# EAGLE board RepRap Color Mixing companion module (EAGLE 9.0.0)
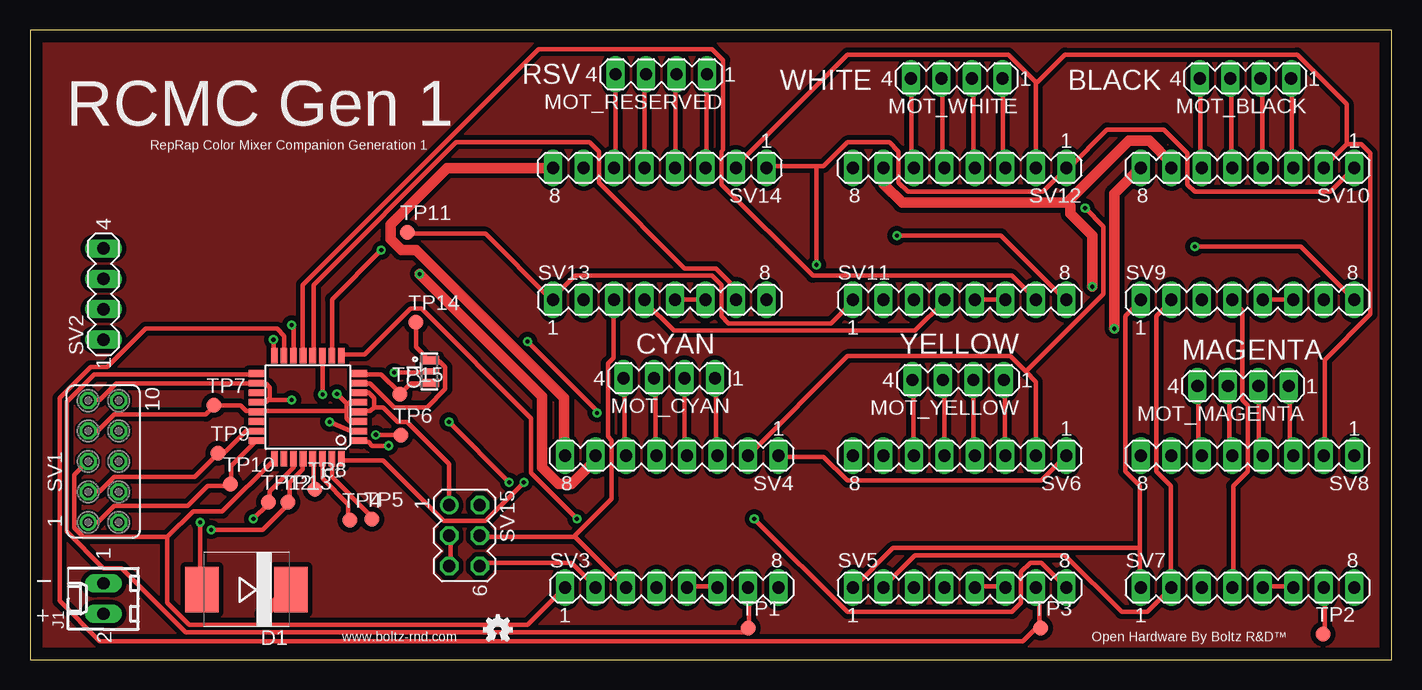
[diagram p0: board, top side]
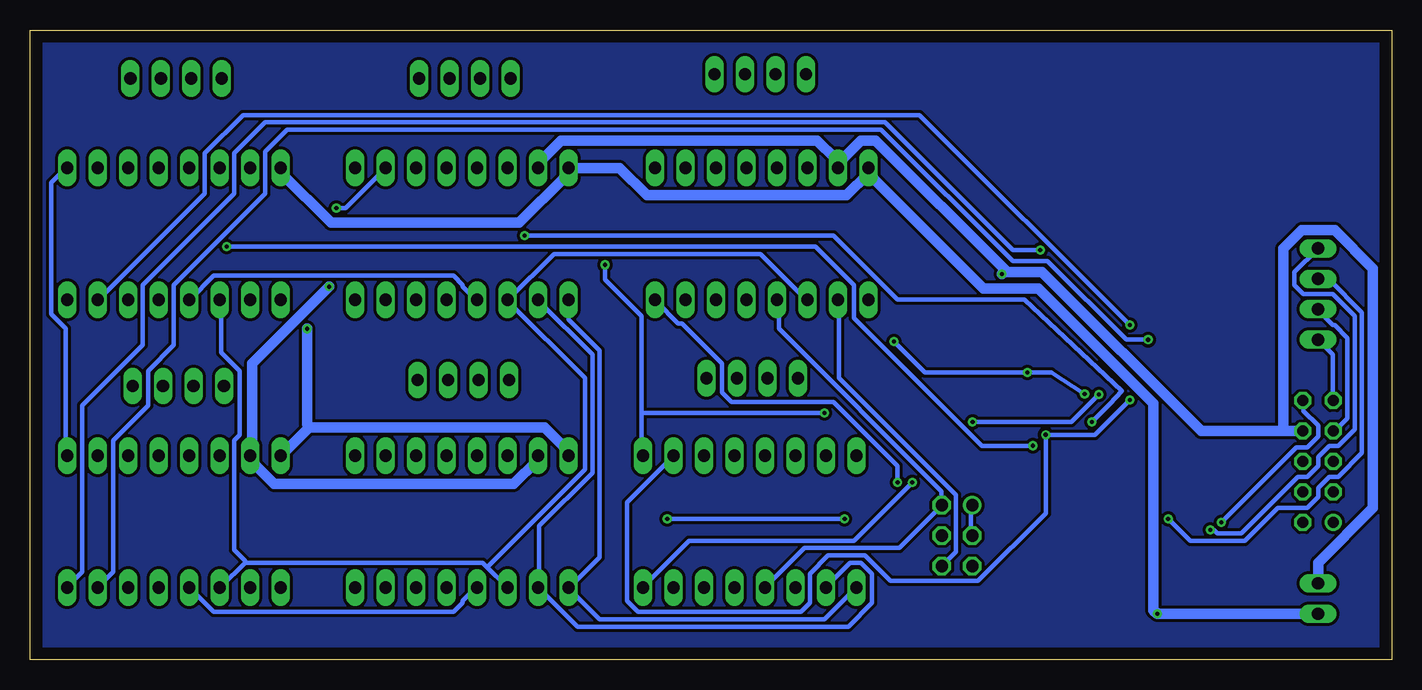
[diagram p1: board, bottom side, seen from below]

Size 113.5 x 52.5 mm. Coordinates in mm from the lower left corner, seen from the top.
Outline: 0,0 113.5,0 113.5,52.5 0,52.5 0,0
Copper layers (1*16): Top 0.035mm / dielectric 1.5mm / Bottom 0.035mm
Design rules "default": minimum track width 6mil, minimum drill 0.35mm, track to track 6mil, track to pad 6mil, pad to pad 6mil, via to via 6mil, smd to smd 6mil, copper to edge 40mil, drill to drill 6mil, minimum pad ring 10mil, minimum via ring 8mil, stop-mask expansion 4mil, vias tented up to drill 0mil, thermal gap 10mil
Net classes: 0 default: width 0.356 mm, clearance 0.254 mm; 1 PWR: width 0.864 mm, drill 0.1 mm, clearance 0.305 mm

## Footprints (pad centres in the part's own frame; a part is rotated, then mirrored left to right if it is on the bottom)
CSTCE-V = smd 0.7 x 1.6: 1 0.95,0; 3 -0.95,0 | smd 0.5 x 1.6: 2 0,0
SMC = smd 2.8 x 3.8: A 3.7,0; C -3.7,0
TQFP32-08 = smd 1.27 x 0.559: 1 -4.293,2.8; 2 -4.293,2; 3 -4.293,1.2; 4 -4.293,0.4; 5 -4.293,-0.4; 6 -4.293,-1.2; 7 -4.293,-2; 8 -4.293,-2.8; 17 4.293,-2.8; 18 4.293,-2; 19 4.293,-1.2; 20 4.293,-0.4; 21 4.293,0.4; 22 4.293,1.2; 23 4.293,2; 24 4.293,2.8 | smd 0.559 x 1.27: 9 -2.8,-4.293; 10 -2,-4.293; 11 -1.2,-4.293; 12 -0.4,-4.293; 13 0.4,-4.293; 14 1.2,-4.293; 15 2,-4.293; 16 2.8,-4.293; 25 2.8,4.293; 26 2,4.293; 27 1.2,4.293; 28 0.4,4.293; 29 -0.4,4.293; 30 -1.2,4.293; 31 -2,4.293; 32 -2.8,4.293
6410-02 = drill 1.016 long: 1 1.27,0; 2 -1.27,0
MA04-1 = drill 1.016 long: 1 -3.81,0; 2 -1.27,0; 3 1.27,0; 4 3.81,0
FE05-2 = drill 0.914: 1 -5.08,1.27 | drill 0.914 octagon: 2 -5.08,-1.27; 3 -2.54,1.27; 4 -2.54,-1.27; 5 0,1.27; 6 0,-1.27; 7 2.54,1.27; 8 2.54,-1.27; 9 5.08,1.27; 10 5.08,-1.27
MA08-1 = drill 1.016 long: 1 -8.89,0; 2 -6.35,0; 3 -3.81,0; 4 -1.27,0; 5 1.27,0; 6 3.81,0; 7 6.35,0; 8 8.89,0
MA03-2 = drill 1.016: 1 -2.54,-1.27 | drill 1.016 octagon: 2 -2.54,1.27; 3 0,-1.27; 4 0,1.27; 5 2.54,-1.27; 6 2.54,1.27
B1,27 = smd 1.27 x 1.27: TP 0,0

## Placement (x,y rotation side)
C1  CSTCE16M0V53-R0  [CSTCE-V]  33.3,24.01 90 top
D1  SS515  [SMC]  18.04,5.82 180 top
IC1  MEGA8-AI  [TQFP32-08]  23.17,21.05 180 top
J1  22-27-2021-02  [6410-02]  6.12,5.08 90 top
MOT_BLACK  [MA04-1]  101.32,48.46 180 top
MOT_CYAN  [MA04-1]  53.29,23.46 180 top
MOT_MAGENTA  [MA04-1]  101.14,22.81 180 top
MOT_RESERVED  [MA04-1]  52.63,48.81 180 top
MOT_WHITE  [MA04-1]  77.26,48.46 180 top
MOT_YELLOW  [MA04-1]  77.38,23.31 180 top
SV1  [FE05-2]  6.12,16.51 90 top
SV2  [MA04-1]  6.12,30.48 90 top
SV3  [MA08-1]  53.5,6 0 top
SV4  [MA08-1]  53.5,17 180 top
SV5  [MA08-1]  77.5,6 0 top
SV6  [MA08-1]  77.5,17 180 top
SV7  [MA08-1]  101.5,6 0 top
SV8  [MA08-1]  101.5,17 180 top
SV9  [MA08-1]  101.5,30 0 top
SV10  [MA08-1]  101.5,41 180 top
SV11  [MA08-1]  77.5,30 0 top
SV12  [MA08-1]  77.5,41 180 top
SV13  [MA08-1]  52.5,30 0 top
SV14  [MA08-1]  52.5,41 180 top
SV15  [MA03-2]  36.22,10.33 270 top
TP1  TPB1,27  [B1,27]  59.89,2.62 0 top
TP2  TPB1,27  [B1,27]  107.81,2.12 0 top
TP3  TPB1,27  [B1,27]  84.23,2.62 0 top
TP4  TPB1,27  [B1,27]  26.65,11.62 0 top
TP5  TPB1,27  [B1,27]  28.49,11.7 0 top
TP6  TPB1,27  [B1,27]  30.91,18.7 0 top
TP7  TPB1,27  [B1,27]  15.33,21.2 0 top
TP8  TPB1,27  [B1,27]  23.75,14.2 0 top
TP9  TPB1,27  [B1,27]  15.67,17.2 0 top
TP10  TPB1,27  [B1,27]  16.72,14.62 0 top
TP11  TPB1,27  [B1,27]  31.47,35.62 0 top
TP12  TPB1,27  [B1,27]  19.87,13.12 0 top
TP13  TPB1,27  [B1,27]  21.52,13.12 0 top
TP14  TPB1,27  [B1,27]  32.17,28.12 0 top
TP15  TPB1,27  [B1,27]  30.82,22.12 0 top
U$2  [OSHW-LOGO-MINI]  39,2.5 0 top

## Library data of the parts
C1 = SamacSys_Parts; ARROW_PART_NUMBER: CSTCE16M0V53-R0; ARROW_PRICE/STOCK: https://www.arrow.com/en/products/cstce16m0v53-r0/murata-manufacturing; DESCRIPTION: Ceramic resonator SMT CSTCE 16.00MHz CSTCE16M0V53-R0, Ceramic Resonator, 16MHz Expander 15pF, 3-Pin Cap Chip, 3.2 x 1.3 x 0.9mm; HEIGHT: mm; MANUFACTURER_NAME: Murata Electronics; MANUFACTURER_PART_NUMBER: CSTCE16M0V53-R0; RS_PART_NUMBER: 7926524P; RS_PRICE/STOCK: http://uk.rs-online.com/web/p/products/7926524P
D1 = diode
IC1 = atmel; MPN: ATMEGA8-16AU; OC_FARNELL: 9171371; OC_NEWARK: 73M8863
J1 = con-molex; MF: MOLEX; OC_FARNELL: unknown; OC_NEWARK: unknown
MOT_BLACK MOT_CYAN MOT_MAGENTA MOT_RESERVED MOT_WHITE MOT_YELLOW SV2-SV15 = con-lstb; OC_FARNELL: unknown; OC_NEWARK: unknown
SV1 = con-lsta; OC_FARNELL: unknown; OC_NEWARK: unknown
TP1-TP15 = testpad
U$2 = SparkFun-Aesthetics

## Nets
+12V [PWR]: D1.C J1.2 SV4.8 SV6.8 SV8.8 SV10.8 SV12.8 SV14.8
DIR_IN: IC1.24 SV1.1 TP10.TP
DR_RSV: IC1.32 SV13.8
DRB: IC1.1 SV9.8
DRC: IC1.11 SV3.8
DRM: IC1.10 SV7.8
DRW: IC1.2 SV11.8
DRY: IC1.9 SV5.8
EN_IN: IC1.25 SV1.5 SV3.1 SV5.1 SV7.1 SV9.1 SV11.1 SV13.1 TP11.TP
EN_OUT: IC1.26
GND: C1.2 IC1.3 IC1.5 IC1.21 SV1.7 SV2.2 SV4.1 SV6.1 SV8.1 SV10.1 SV12.1 SV14.1 TP7.TP
GNDA [PWR]: J1.1 SV1.8 SV4.7 SV6.7 SV8.7 SV10.7 SV12.7 SV14.7
MS1: SV3.2 SV5.2 SV7.2 SV9.2 SV11.2 SV13.2 SV15.6
MS2: SV3.3 SV5.3 SV7.3 SV9.3 SV11.3 SV13.3 SV15.4
MS3: SV3.4 SV5.4 SV7.4 SV9.4 SV11.4 SV13.4 SV15.2
N$1: C1.3 IC1.8 TP15.TP
N$2: C1.1 IC1.7 TP14.TP
N$3: IC1.29 TP8.TP
N$4: D1.A SV1.10
N$5: SV3.5 SV3.6
N$11: MOT_CYAN.1 SV4.3
N$12: MOT_CYAN.2 SV4.4
N$13: MOT_CYAN.3 SV4.5
N$14: MOT_CYAN.4 SV4.6
N$21: SV5.5 SV5.6
N$27: MOT_YELLOW.1 SV6.3
N$28: MOT_YELLOW.2 SV6.4
N$29: MOT_YELLOW.3 SV6.5
N$30: MOT_YELLOW.4 SV6.6
N$37: SV7.5 SV7.6
N$38: IC1.22
N$43: MOT_MAGENTA.1 SV8.3
N$44: MOT_MAGENTA.2 SV8.4
N$45: MOT_MAGENTA.3 SV8.5
N$46: MOT_MAGENTA.4 SV8.6
N$49: IC1.19
N$53: SV9.5 SV9.6
N$59: MOT_BLACK.1 SV10.3
N$60: MOT_BLACK.2 SV10.4
N$61: MOT_BLACK.3 SV10.5
N$62: MOT_BLACK.4 SV10.6
N$69: SV11.5 SV11.6
N$75: MOT_WHITE.1 SV12.3
N$76: MOT_WHITE.2 SV12.4
N$77: MOT_WHITE.3 SV12.5
N$78: MOT_WHITE.4 SV12.6
N$85: SV13.5 SV13.6
N$91: MOT_RESERVED.1 SV14.3
N$92: MOT_RESERVED.2 SV14.4
N$93: MOT_RESERVED.3 SV14.5
N$94: MOT_RESERVED.4 SV14.6
RX: IC1.30 TP4.TP
SCL: IC1.28 SV2.4 TP13.TP
SDA: IC1.27 SV2.3 TP12.TP
ST_RSV: IC1.12 SV13.7
STB: IC1.14 SV9.7
STC: IC1.17 SV3.7 TP1.TP
STEPIN: IC1.23 SV1.3 TP9.TP
STM: IC1.16 SV7.7 TP2.TP
STW: IC1.13 SV11.7
STY: IC1.15 SV5.7 TP3.TP
TX: IC1.31 TP5.TP
VCC: IC1.18 IC1.20 SV1.9 SV2.1 SV4.2 SV6.2 SV8.2 SV10.2 SV12.2 SV14.2 TP6.TP
VCC5V: IC1.4 IC1.6 SV15.1 SV15.3 SV15.5

## Tracks (layer width: path | path; a pad name or v marks a point on that pad's centre or on a via)
+12V  (via drill 0.35)
  Top 0.864: v19.53,3.81 21.66,5.94 D1.C | SV4.8 44.52,17.07 44.52,21.79 32.18,34.14 30.96,34.14 30.05,35.05 30.05,36.27 34.77,41 43.46,41 SV14.8 | v90.4,27.58 90.4,38.86 92.53,41 SV10.8
  Bottom 0.864: 90.25,19.36 70.58,19.36 68.76,17.53 68.76,17.07 SV6.8 | 90.25,19.36 92.53,17.07 SV8.8 | J1.2 v19.53,3.81 19.84,4.12 19.84,21.34 29.44,30.94 34.01,30.94 43.31,40.23 SV14.8 43.61,40.54 45.44,38.71 62.05,38.71 64.34,41 SV12.8 68.91,40.69 68.91,40.23 72.72,36.42 88.42,36.42 92.53,40.54 92.53,41 SV10.8 | v90.4,27.58 90.4,19.66 90.25,19.36
DIR_IN
  Top 0.356: IC1.24 18.77,18.14 16.79,16.15 16.79,14.63 TP10.TP 16.64,14.48 14.81,14.48 13.13,12.8 7.03,12.8 5.66,11.43 SV1.1
DR_RSV  (via drill 0.35)
  Top 0.356: v41.17,14.78 37.97,11.58 34.47,11.58 29.44,16.61 26.08,16.61 IC1.32
  Bottom 0.356: v41.17,14.78 41.17,16.15 46.51,21.49 55.04,21.49 55.8,22.25 55.8,24.69 59.16,28.04 59.46,28.04 61.29,29.87 SV13.8
DRB  (via drill 0.35)
  Top 0.356: v29.89,17.83 28.52,17.83 28.22,18.14 27.61,18.14 IC1.1 | v97.1,34.44 105.94,34.44 110.36,30.02 SV9.8
  Bottom 0.356: v29.89,17.83 34.16,17.83 44.83,28.5 44.83,31.24 48.03,34.44 v97.1,34.44
DRC  (via drill 0.35)
  Top 0.356: v24.41,22.1 24.41,25.3 IC1.11 | v39.95,14.78 v34.92,19.81
  Bottom 0.356: v24.41,22.1 26.69,19.81 v34.92,19.81 | v39.95,14.78 44.83,9.91 58.55,9.91 62.36,6.1 SV3.8
DRM  (via drill 0.35)
  Top 0.356: IC1.10 25.17,30.02 v29.29,34.14
  Bottom 0.356: v29.29,34.14 31.57,34.14 42.24,44.81 93.9,44.81 96.49,42.22 96.49,38.86 104.11,31.24 104.11,26.21 109.14,21.18 109.14,7.32 110.36,6.1 SV7.8
DRW  (via drill 0.35)
  Top 0.356: IC1.2 26.74,19.05 v24.98,19.81 | v72.26,35.36 80.95,35.36 86.28,30.02 SV11.8
  Bottom 0.356: v24.98,19.81 23.49,21.29 22.49,22.4 30.61,30.02 41.17,30.02 46.51,35.36 v72.26,35.36
DRY  (via drill 0.35)
  Top 0.356: v45.59,11.73 41.78,15.54 41.78,20.12 32.64,29.26 31.72,29.26 27.91,25.45 26.08,25.45 IC1.9 | v60.37,11.73 68.15,3.96 81.86,3.96 82.62,4.72 82.62,7.32 83.39,8.08 84.3,8.08 86.28,6.1 SV5.8
  Bottom 0.356: v60.37,11.73 v45.59,11.73
EN_IN
  Top 0.356: 92.53,9.3 92.53,14.48 91.31,15.7 91.31,28.65 92.53,29.87 SV9.1 | 92.53,9.3 92.53,6.1 SV7.1 | 11.45,10.21 13.59,12.34 16.03,12.34 20.29,16.61 IC1.25 | 11.45,10.21 4.44,10.21 3.68,10.97 3.68,15.39 4.75,16.46 SV1.5 | TP11.TP 31.57,35.51 37.97,35.51 43.46,30.02 SV13.1 43.61,30.18 45.44,32 56.87,32 57.63,31.24 57.63,28.65 58.24,28.04 66.78,28.04 68.6,29.87 SV11.1 | 11.45,10.21 11.45,4.72 13.28,2.9 41.48,2.9 44.52,5.94 SV3.1 | 92.53,9.3 71.96,9.3 68.76,6.1 SV5.1
  Bottom 0.356: SV3.1 44.68,5.94 47.27,3.35 66.01,3.35 68.6,5.94 SV5.1 68.45,6.1 66.01,8.53 66.01,25.76 68.6,28.35 68.6,29.87 SV11.1
GND  (via drill 0.35)
  Top 0.356: 15.42,21.18 TP7.TP | TP7.TP 15.57,21.18 17.55,21.18 18.01,20.73 18.77,20.73 IC1.21 18.92,20.73 26.39,20.73 | 26.39,21.18 26.39,20.73 | 26.39,20.73 26.39,20.12 26.69,19.81 27.46,19.81 IC1.3 | 26.39,21.18 26.69,21.49 27.46,21.49 IC1.5 | v30.35,23.93 33.25,23.93 C1.2 | v25.58,22.14 26.39,21.34 26.39,21.18 | SV1.7 5.66,19.05 7.03,20.42 14.65,20.42 15.26,21.03 TP7.TP | SV4.1 62.51,16.92 66.17,16.92 68.15,14.94 84.3,14.94 86.28,16.92 SV6.1 | 65.56,41.15 66.17,41.15 68.15,43.13 71.65,43.13 72.41,42.37 72.41,39.78 73.18,39.01 84.45,39.01 86.44,41 SV12.1 86.59,41 89.79,44.2 94.51,44.2 96.49,42.22 96.49,39.62 97.1,39.01 108.38,39.01 110.36,41 SV10.1 | 65.56,41.15 61.44,41.15 SV14.1 | 65.56,41.15 v65.56,32.92 | v41.48,26.52 47.27,20.73 v47.27,20.57
  Bottom 0.356: v25.58,22.14 28.37,23.93 v30.35,23.93 38.89,23.93 v41.48,26.52 | SV2.2 6.12,29.11 4.9,27.89 4.75,27.89 3.68,26.82 3.68,20.12 4.75,19.05 SV1.7 | SV8.1 110.51,17.07 110.51,27.58 111.73,28.8 111.73,39.78 110.51,41 SV10.1 | 62.51,20.57 62.51,28.65 65.56,31.7 v65.56,32.92 | 62.51,20.57 62.51,17.07 SV4.1 | 62.51,20.57 v47.27,20.57
GNDA  (via drill 0.35)
  Top 0.864: v32.48,32.16 42.7,21.95 42.7,16 44.07,14.63 45.13,14.63 47.12,16.61 47.12,16.92 SV4.7 | 86.44,38.1 91.62,43.28 93.29,43.28 95.12,41.45 95.12,41.15 SV10.7 | 86.44,38.1 72.72,38.1 71.19,39.62 71.19,41 SV12.7 | v88.57,31.09 88.57,35.36 86.74,37.19 86.74,37.8 86.44,38.1
  Bottom 0.864: SV6.7 71.19,16.92 71.19,16.61 73.18,14.63 93.14,14.63 95.12,16.61 95.12,16.92 SV8.7 94.97,17.37 94.97,24.69 v88.57,31.09 | 9.02,19.05 15.87,19.05 29.13,32.31 32.03,32.31 32.18,32.46 | 9.02,19.05 SV1.8 | 32.18,32.46 43,43.28 44.22,43.28 46.05,41.45 46.05,41.15 SV14.7 46.35,41.76 47.88,43.28 69.21,43.28 71.04,41.45 71.04,41.15 SV12.7 | J1.1 6.12,8.08 1.55,12.65 1.55,32.61 4.75,35.81 7.49,35.81 9.02,34.29 9.02,19.05 | v32.48,32.16 32.18,32.46
MS1
  Top 0.356: SV3.2 47.12,6.1 45.13,8.08 37.67,8.08 37.51,7.92 SV15.6 | SV9.2 95.12,29.87 93.9,28.65 93.9,15.7 95.12,14.48 95.12,6.1 SV7.2 95.12,5.94 93.14,3.96 91.01,3.96 86.28,8.69 73.79,8.69 71.19,6.1 SV5.2
  Bottom 0.356: SV13.2 46.05,29.87 46.05,23.47 36.3,13.72 36.3,8.99 37.36,7.92 SV15.6 | SV11.2 71.04,29.87 66.62,25.45 66.62,15.54 71.04,11.12 71.04,6.1 SV5.2 71.04,5.94 67.84,2.74 45.29,2.74 43.31,4.72 43.31,7.16 44.22,8.08 45.13,8.08 47.12,6.1 SV3.2
MS2
  Top 0.356: 45.44,10.21 49.55,6.1 SV3.3 | 45.44,10.21 37.51,10.21 SV15.4 | SV13.3 48.64,29.87 48.64,25.15 48.18,24.69 48.18,18.59 48.49,18.29 48.49,13.41 45.44,10.36 45.44,10.21
  Bottom 0.356: 75.39,7.7 75.77,8.08 95.58,8.08 | 75.39,7.7 73.79,6.1 SV5.3 | 95.58,8.08 97.56,6.1 SV7.3 | SV9.3 97.56,29.87 97.56,25.6 96.04,24.08 96.04,18.75 96.49,18.29 96.49,9.14 95.58,8.23 95.58,8.08 | SV13.3 48.79,30.02 52.6,33.83 69.82,33.83 73.63,30.02 SV11.3 73.63,29.87 67.23,23.47 67.23,15.85 75.39,7.7
MS3
  Top 0.356: SV7.4 100.3,6.1 100.3,14.48 101.52,15.7 101.52,21.18 101.06,21.64 101.06,29.11 100.3,29.87 SV9.4 | SV13.4 51.23,29.87 53.67,27.43 73.79,27.43 76.22,29.87 SV11.4
  Bottom 0.356: SV3.4 52.15,6.1 48.94,9.3 41.02,9.3 37.51,12.8 SV15.2 37.51,12.95 37.51,14.02 51.08,27.58 51.08,29.87 SV13.4 | SV5.4 76.38,5.94 77.44,4.88 77.44,4.72 78.2,3.96 98.17,3.96 100.15,5.94 SV7.4 | SV11.4 76.38,30.02 77.44,31.09 77.44,31.24 78.2,32 98.17,32 100.15,30.02 SV9.4
N$1
  Top 0.356: IC1.8 27.61,23.77 29.29,23.77 30.81,22.25 TP15.TP 30.96,22.25 31.72,23.01 33.25,23.01 C1.3
N$2
  Top 0.356: IC1.7 27.61,23.01 28.37,23.01 30.35,21.03 33.09,21.03 34.62,22.55 34.62,24.38 34.16,24.84 33.4,24.84 C1.1 33.25,24.99 32.18,26.06 32.18,28.04 TP14.TP
N$3
  Top 0.356: IC1.29 23.65,16.61 23.65,14.33 TP8.TP
N$4  (via drill 0.35)
  Top 0.356: v14.2,11.43 14.2,5.94 D1.A
  Bottom 0.356: v14.2,11.43 7.95,17.68 7.03,17.68 6.12,18.59 6.12,19.51 7.34,20.73 7.34,21.49 SV1.10
N$5
  Top 0.356: SV3.5 54.89,6.1 57.17,6.1 SV3.6
N$6
  pour Top (isolate 0.4): 0,52.5 113.5,52.5 113.5,0 0,0
N$7
  pour Bottom: 0,52.5 0,0 113.5,0 113.5,52.5
N$11
  Top 0.356: MOT_CYAN.1 57.17,23.32 57.17,17.07 SV4.3
N$12
  Top 0.356: MOT_CYAN.2 54.58,23.32 54.58,17.22 54.74,17.07 SV4.4
N$13
  Top 0.356: MOT_CYAN.3 52.15,23.32 52.15,17.07 SV4.5
N$14
  Top 0.356: MOT_CYAN.4 49.55,23.32 49.55,17.07 SV4.6
N$21
  Top 0.356: SV5.5 78.81,6.1 81.25,6.1 SV5.6
N$27
  Top 0.356: MOT_YELLOW.1 81.25,23.16 81.25,17.07 SV6.3
N$28
  Top 0.356: MOT_YELLOW.2 78.66,23.16 78.66,17.07 SV6.4
N$29
  Top 0.356: MOT_YELLOW.3 76.22,23.16 76.22,17.07 SV6.5
N$30
  Top 0.356: MOT_YELLOW.4 73.63,23.16 73.63,17.07 SV6.6
N$37
  Top 0.356: SV7.5 102.89,6.1 105.18,6.1 SV7.6
N$43
  Top 0.356: MOT_MAGENTA.1 105.03,22.71 105.03,17.22 105.18,17.07 SV8.3
N$44
  Top 0.356: MOT_MAGENTA.2 102.44,22.71 102.44,17.37 102.74,17.07 SV8.4
N$45
  Top 0.356: MOT_MAGENTA.3 100,22.71 100,17.22 100.15,17.07 SV8.5
N$46
  Top 0.356: MOT_MAGENTA.4 97.41,22.71 97.41,17.22 97.56,17.07 SV8.6
N$53
  Top 0.356: SV9.5 102.89,30.02 105.18,30.02 SV9.6
N$59
  Top 0.356: MOT_BLACK.1 105.18,48.31 105.18,41.15 SV10.3
N$60
  Top 0.356: MOT_BLACK.2 102.74,48.31 102.74,41.15 SV10.4
N$61
  Top 0.356: MOT_BLACK.3 100.15,48.31 100.15,41.15 SV10.5
N$62
  Top 0.356: MOT_BLACK.4 97.56,48.31 97.56,41.15 SV10.6
N$69
  Top 0.356: SV11.5 78.81,30.02 81.25,30.02 SV11.6
N$75
  Top 0.356: MOT_WHITE.1 81.1,48.31 81.1,41.3 81.25,41.15 SV12.3
N$76
  Top 0.356: MOT_WHITE.2 78.66,48.31 78.66,41.15 SV12.4
N$77
  Top 0.356: MOT_WHITE.3 76.07,48.31 76.07,41.3 76.22,41.15 SV12.5
N$78
  Top 0.356: MOT_WHITE.4 73.48,48.31 73.48,41.3 73.63,41.15 SV12.6
N$85
  Top 0.356: SV13.5 53.82,30.02 56.26,30.02 SV13.6
N$91
  Top 0.356: SV14.3 56.41,41.15 56.41,48.77 MOT_RESERVED.1
N$92
  Top 0.356: SV14.4 53.82,41.15 53.82,48.77 MOT_RESERVED.2
N$93
  Top 0.356: SV14.5 51.23,41.15 51.23,48.77 MOT_RESERVED.3
N$94
  Top 0.356: SV14.6 48.79,41.15 48.79,48.77 MOT_RESERVED.4
RX
  Top 0.356: IC1.30 24.41,16.61 24.41,15.09 26.54,12.95 26.54,11.73 TP4.TP
SCL  (via drill 0.35)
  Top 0.356: IC1.28 22.73,16.61 22.73,15.85 21.66,14.78 21.66,13.26 TP13.TP 21.51,12.95 19.38,10.82 v15.11,10.82
  Bottom 0.356: v15.11,10.82 14.81,10.82 14.5,10.52 12.52,10.52 7.8,15.24 7.03,15.24 6.12,16.15 6.12,16.92 5.21,17.83 4.44,17.83 3.07,19.2 3.07,28.65 4.9,30.48 7.34,30.48 8.1,31.24 8.1,32.31 SV2.4
SDA  (via drill 0.35)
  Top 0.356: IC1.27 21.97,16.61 21.97,16 19.99,14.02 19.99,13.26 TP12.TP 19.84,12.95 v18.62,11.73
  Bottom 0.356: v18.62,11.73 16.79,9.91 12.22,9.91 9.47,12.65 7.03,12.65 6.12,13.56 6.12,14.33 5.21,15.24 4.44,15.24 2.46,17.22 2.46,28.96 5.21,31.7 6.12,31.7 SV2.3
ST_RSV
  Top 0.356: IC1.12 23.65,25.45 23.65,31.24 35.53,43.13 46.66,43.13 47.42,42.37 47.42,39.78 54.58,32.61 57.17,32.61 58.7,31.09 58.7,30.02 SV13.7
STB  (via drill 0.35)
  Top 0.356: v21.82,27.89 21.97,27.74 21.97,25.45 IC1.14
  Bottom 0.356: v21.82,27.89 39.34,45.41 95.73,45.41 98.93,42.22 98.93,38.86 107.77,30.02 SV9.7
STC
  Top 0.356: SV3.7 59.92,5.94 59.92,2.74 TP1.TP 59.77,2.59 59.46,2.29 12.98,2.29 7.64,7.62 6.12,7.62 3.07,10.67 3.07,21.49 5.36,23.77 18.77,23.77 IC1.17
STEPIN
  Top 0.356: IC1.23 18.01,19.05 16.18,17.22 15.72,17.22 TP9.TP 15.57,17.07 13.74,15.24 7.03,15.24 5.82,14.02 4.9,14.02 SV1.3
STM  (via drill 0.35)
  Top 0.356: v20.29,26.67 20.29,25.45 IC1.16 | TP2.TP 107.92,2.13 107.92,5.94 SV7.7
  Bottom 0.356: v20.29,26.67 22.12,26.67 28.68,33.22 31.57,33.22 42.54,44.2 92.07,44.2 93.9,42.37 93.9,38.86 101.52,31.24 101.52,26.21 103.66,24.08 103.66,21.18 106.55,18.29 106.55,7.32 107.77,6.1 SV7.7
STW
  Top 0.356: IC1.13 22.73,25.45 22.73,31.24 42.39,50.9 56.87,50.9 57.78,49.99 57.78,42.52 57.63,42.37 57.63,39.62 65.25,32 81.86,32 83.84,30.02 SV11.7
STY
  Top 0.356: SV5.7 84,5.94 84.15,5.79 84.15,2.74 TP3.TP 84,2.74 82.78,1.52 5.82,1.52 2.46,4.88 2.46,21.79 5.05,24.38 6.42,24.38 9.62,27.58 20.6,27.58 21.21,26.98 21.21,25.45 IC1.15
TX
  Top 0.356: IC1.31 25.17,15.24 28.37,12.04 28.37,11.73 TP5.TP
VCC  (via drill 0.35)
  Top 0.356: 19.91,21.72 19.99,21.79 19.99,22.71 19.68,23.01 18.92,23.01 IC1.18 18.77,23.01 7.19,23.01 5.82,21.64 4.9,21.64 SV1.9 | 19.91,21.72 19.68,21.49 18.92,21.49 IC1.20 | v28.83,18.75 30.81,18.75 TP6.TP | v21.82,21.64 19.99,21.64 19.91,21.72 | 83.01,24 83.84,23.16 83.84,17.07 SV6.2 | 83.01,24 81.71,25.3 68.15,25.3 59.92,17.07 SV4.2 | 109.75,42.98 110.97,42.98 111.73,42.22 111.73,28.8 107.92,24.99 107.92,17.07 SV8.2 | 109.75,42.98 107.92,41.15 SV10.2 | 83.84,48.16 81.56,50.44 68.15,50.44 58.85,41.15 SV14.2 | 83.84,48.16 83.84,41.15 SV12.2 | 109.75,42.98 109.75,46.33 105.64,50.44 86.28,50.44 84,48.16 83.84,48.16 | 83.01,24 89.48,30.48 89.48,36.12 v87.96,37.64
  Bottom 0.356: SV2.1 4.9,25.45 4.9,21.64 SV1.9 | v21.82,21.64 24.71,18.75 v28.83,18.75 28.83,12.19 34.47,6.55 41.78,6.55 43.91,8.69 46.96,8.69 48.49,7.16 48.49,4.72 49.25,3.96 62.81,3.96 63.73,4.88 63.73,13.11 59.92,16.92 SV4.2 | v87.96,37.64 87.2,37.64 SV12.2
VCC5V
  Top 0.356: SV15.5 35.08,7.92 35.08,10.21 SV15.3 | 28.68,21.03 28.37,20.73 27.61,20.73 IC1.4 | 28.68,21.03 28.68,21.79 28.22,22.25 27.61,22.25 IC1.6 | 28.68,21.03 29.44,21.03 30.66,19.81 31.42,19.81 34.92,16.31 34.92,12.95 SV15.1
  Bottom 0.356: SV15.3 35.08,10.36 35.08,12.8 SV15.1

## Text on the board
tNames: RSV | WHITE | BLACK | RCMC Gen 1 | RepRap Color Mixer Companion Generation 1 | CYAN | YELLOW | MAGENTA | + | www.boltz-rnd.com | Open Hardware By Boltz R&D™
tSilk: -- | -